# EAGLE board pi_nfc (EAGLE 9.5.0)
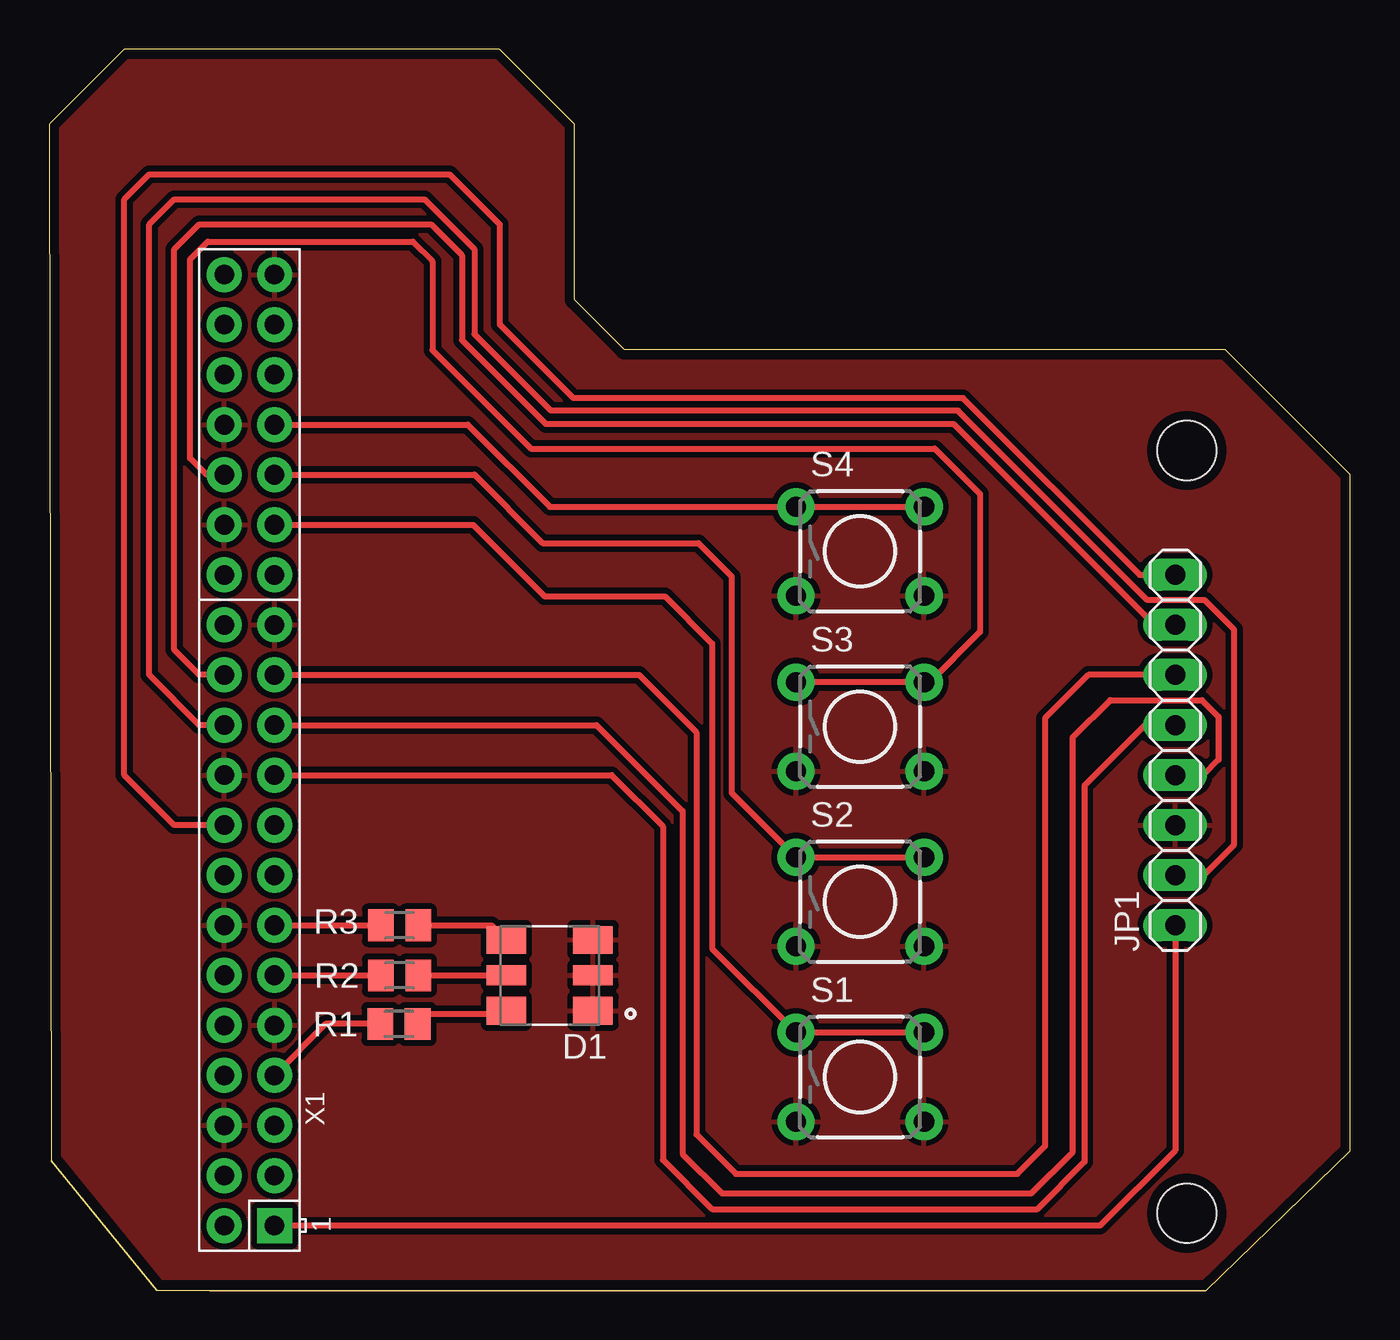
[diagram p0: board, top side]

Size 66.04 x 62.99 mm. Coordinates in mm from the lower left corner, seen from the top.
Outline: 58.72,0 66.04,7.11 66.04,41.4 59.69,47.75 29.21,47.75 26.67,50.29 26.67,59.18 22.86,62.99 3.81,62.99 0,59.18 0.1,6.59 5.46,0.03 8.15,0 58.72,0
Copper layers (1*16): Top 0.035mm / dielectric 1.5mm / Bottom 0.035mm
Design rules "HVA-LPKF": minimum track width 0.3mm, minimum drill 0.6mm, track to track 0.3mm, track to pad 0.3mm, pad to pad 0.3mm, via to via 0.3mm, smd to smd 0.3mm, copper to edge 0.5mm, drill to drill 0.5mm, minimum pad ring 0.3mm, minimum via ring 0.3mm, stop-mask expansion 0.1mm, vias tented up to drill 0mil, thermal gap 0.3mm
Holes 3 mm at 57.75,42.63 57.75,3.93

## Footprints (pad centres in the part's own frame; a part is rotated, then mirrored left to right if it is on the bottom)
LED_QBLP679E-RGB = smd 2 x 1.4: 1 -2.2,1.8; 3 -2.2,-1.8; 4 2.2,-1.8; 6 2.2,1.8 | smd 2 x 1: 2 -2.2,0; 5 2.2,0
1X08 = drill 1.016 long: 1 -8.89,0; 2 -6.35,0; 3 -3.81,0; 4 -1.27,0; 5 1.27,0; 6 3.81,0; 7 6.35,0; 8 8.89,0
M0805 = smd 1.3 x 1.6: 1 -0.95,0; 2 0.95,0
TACTILE-PTH = drill 1.016 pad 1.88: 1 -3.251,2.261; 2 3.251,2.261; 3 -3.251,-2.261; 4 3.251,-2.261
RASPI_GPIO_B+_PIN = drill 1 pad 1.778 square: 1 -24.13,-1.27 | drill 1 pad 1.778: 2 -24.13,1.27; 3 -21.59,-1.27; 4 -21.59,1.27; 5 -19.05,-1.27; 6 -19.05,1.27; 7 -16.51,-1.27; 8 -16.51,1.27; 9 -13.97,-1.27; 10 -13.97,1.27; 11 -11.43,-1.27; 12 -11.43,1.27; 13 -8.89,-1.27; 14 -8.89,1.27; 15 -6.35,-1.27; 16 -6.35,1.27; 17 -3.81,-1.27; 18 -3.81,1.27; 19 -1.27,-1.27; 20 -1.27,1.27; 21 1.27,-1.27; 22 1.27,1.27; 23 3.81,-1.27; 24 3.81,1.27; 25 6.35,-1.27; 26 6.35,1.27; 27 8.89,-1.27; 28 8.89,1.27; 29 11.43,-1.27; 30 11.43,1.27; 31 13.97,-1.27; 32 13.97,1.27; 33 16.51,-1.27; 34 16.51,1.27; 35 19.05,-1.27; 36 19.05,1.27; 37 21.59,-1.27; 38 21.59,1.27; 39 24.13,-1.27; 40 24.13,1.27

## Placement (x,y rotation side)
D1  QBLP679E-RGB  [LED_QBLP679E-RGB]  25.4,16 180 top
JP1  [1X08]  57.15,27.43 90 top
R1  [M0805]  17.75,13.53 0 top
R2  [M0805]  17.78,16 0 top
R3  [M0805]  17.78,18.54 0 top
S1  [TACTILE-PTH]  41.16,10.84 0 top
S2  [TACTILE-PTH]  41.16,19.73 0 top
S3  [TACTILE-PTH]  41.16,28.62 0 top
S4  [TACTILE-PTH]  41.16,37.51 0 top
X1  RASPI_GPIO_B+#_PIN  [RASPI_GPIO_B+_PIN]  10.16,27.43 90 top

## Library data of the parts
D1 = QBLP679E-RGB; DESCRIPTION: Led Rgb Diffused 6smd; DIGI-KEY_PART_NUMBER: 1516-1131-1-ND; DIGI-KEY_PURCHASE_URL: https://www.digikey.nl/product-detail/en/qt-brightek-qtb/QBLP679E-RGB/1516-1131-1-ND/4814858?utm_source=snapeda&utm_medium=aggregator&utm_campaign=symbol; MF: QT Brightek; MP: QBLP679E-RGB; PACKAGE: PLCC-6 QT Brightek
JP1 = pinhead
R1-R3 = rcl; SPICEPREFIX: R
S1-S4 = SparkFun-Electromechanical
X1 = raspberrypi_bastelstube_v13

## Nets
3V3B: X1.17
5V0A: X1.2
5V0B: X1.4
GND: D1.1 D1.2 D1.3 JP1.3 S1.3 S1.4 S2.3 S2.4 S3.3 S3.4 S4.3 S4.4 X1.6 X1.9 X1.14 X1.20 X1.25 X1.30 X1.34 X1.39
N$1: JP1.2 X1.22
N$2: D1.6 R1.2
N$3: D1.5 R2.2
N$4: D1.4 R3.2
N$5: R1.1 X1.7
N$6: JP1.4 X1.21
N$7: JP1.5 X1.19
N$8: JP1.6 X1.23
N$9: JP1.7 X1.24
N$10: JP1.8 X1.18
N$11: R2.1 X1.11
N$12: R3.1 X1.13
N$13: S1.1 S1.2 X1.29
N$14: S2.1 S2.2 X1.31
N$15: S3.1 S3.2 X1.32
N$16: S4.1 S4.2 X1.33
VCC: JP1.1 X1.1

## Tracks (layer width: path | path; a pad name or v marks a point on that pad's centre or on a via)
GND
  pour Top: 74.93,-4.29 0,-4.27 0,64.26 1.27,65.53 74.93,64.39
N$1
  Top 0.3: X1.22 7.62,28.7 5.08,31.24 5.08,54.1 6.35,55.37 19.05,55.37 21.59,52.83 21.59,48.53 25.47,44.65 46.13,44.65 55.74,35.04 58.65,35.04 60.15,33.54 60.15,22.63 58.6,21.08 JP1.2
N$2
  Top 0.3: R1.2 19.2,14.03 23.2,14.03 D1.6
N$3
  Top 0.3: R2.2 D1.5
N$4
  Top 0.3: R3.2 22.46,18.54 D1.4
N$5
  Top 0.3: R1.1 14.04,13.53 X1.7
N$6
  Top 0.3: X1.21 27.78,28.7 32.15,24.33 32.15,6.93 34.15,4.93 49.85,4.93 51.95,7.03 51.95,28.07 53.85,29.97 58.51,29.97 59.35,29.13 59.35,26.93 58.58,26.16 JP1.4
N$7
  Top 0.3: X1.19 28.55,26.16 31.15,23.56 31.15,6.63 33.65,4.13 50.15,4.13 52.55,6.53 52.55,25.63 55.62,28.7 JP1.5
N$8
  Top 0.3: X1.23 29.94,31.24 32.85,28.33 32.85,7.93 34.85,5.93 49.15,5.93 50.55,7.33 50.55,29.04 52.75,31.24 JP1.6
N$9
  Top 0.3: X1.24 7.62,31.24 6.35,32.51 6.35,52.83 7.62,54.1 19.38,54.1 20.95,52.53 20.95,48.23 25.21,43.96 45.91,43.96 56.1,33.78 JP1.7
N$10
  Top 0.3: X1.18 6.35,23.62 3.81,26.16 3.81,55.37 5.08,56.64 20.32,56.64 22.86,54.1 22.86,49.03 26.6,45.28 46.38,45.28 55.35,36.32 JP1.8
N$11
  Top 0.3: X1.11 R2.1
N$12
  Top 0.3: X1.13 15.24,18.54 15.56,18.54 R3.1
N$13
  Top 0.3: X1.29 21.52,38.86 25.15,35.23 31.25,35.23 33.65,32.83 33.65,17.36 S1.1 S1.2
N$14
  Top 0.3: X1.31 21.58,41.4 25.05,37.93 32.95,37.93 34.65,36.23 34.65,25.25 S2.1 S2.2
N$15
  Top 0.3: X1.32 7.98,41.4 7.15,42.23 7.15,52.33 8.05,53.23 18.45,53.23 19.45,52.23 19.45,47.73 24.45,42.73 44.95,42.73 47.25,40.43 47.25,33.43 44.7,30.88 S3.2 S3.1
N$16
  Top 0.3: X1.33 21.24,43.94 25.41,39.77 S4.1 S4.2
VCC
  Top 0.3: X1.1 53.34,3.3 57.15,7.11 JP1.1